# Altium PCB Sensor_Box_RTD2DIG.PCBDOC (part 1 of 2)
Units mm, origin at the board's own origin, x right, y up, seen from the top; angles counter-clockwise.
Board outline 22.3 x 72.8 mm, 2 copper layers (Top, Bot), stack 1.621 mm thick; 89 components, 78 nets, 328 pads, 185 vias.
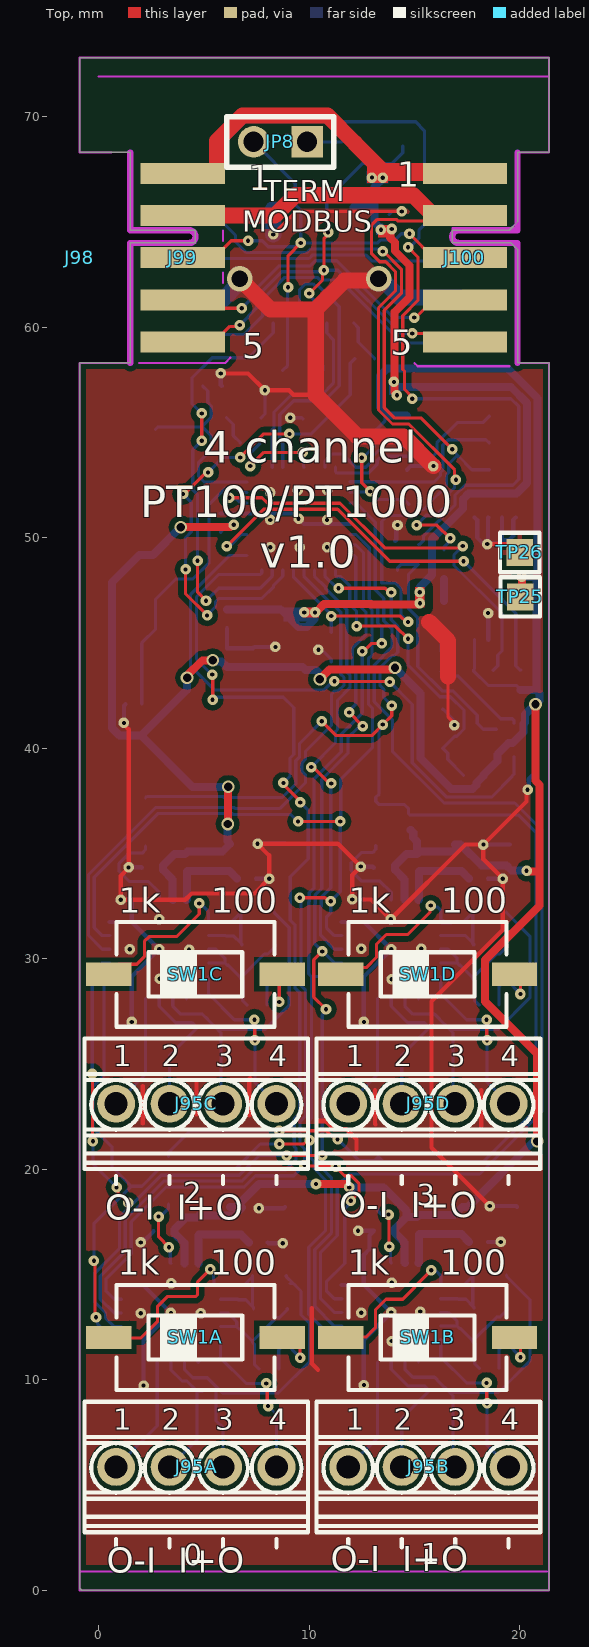
[diagram p0: Top view]
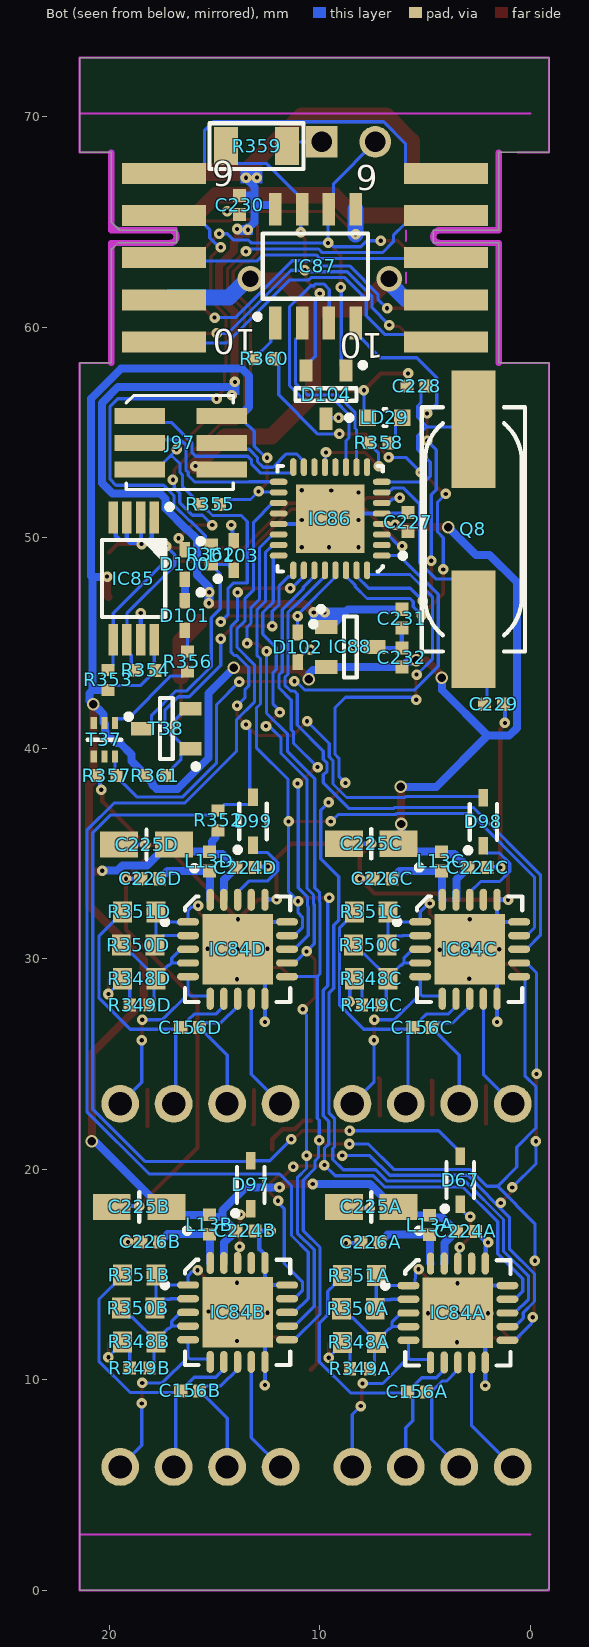
[diagram p1: Bot view, seen from below]
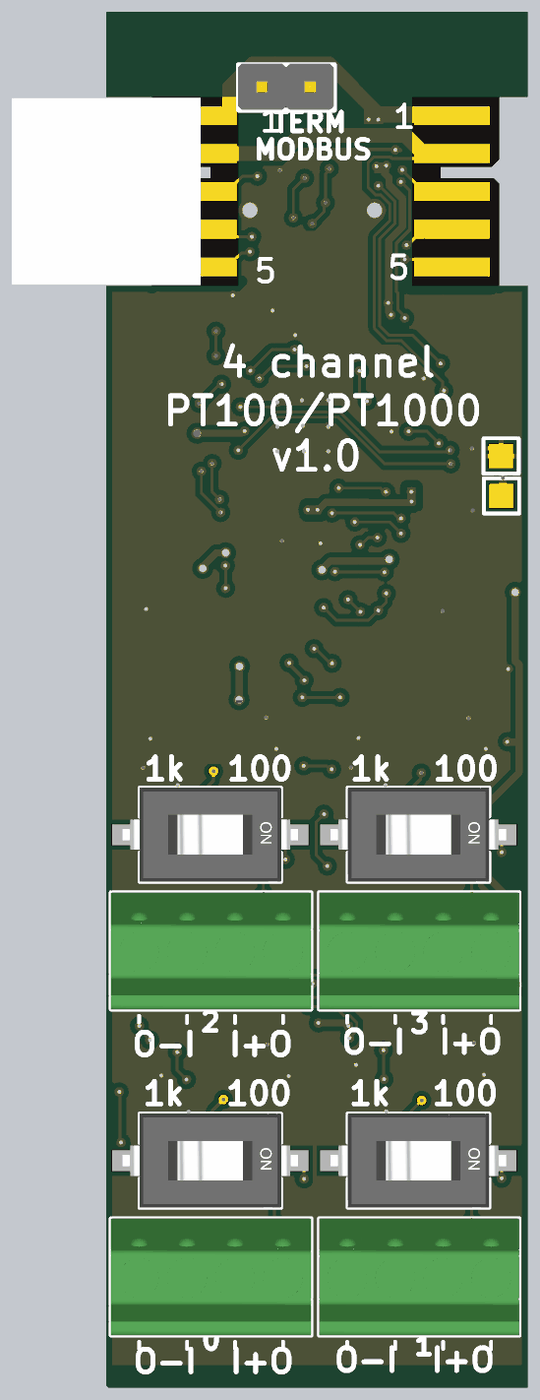
[diagram p3: 3D render of the assembled board from above, using the file's embedded part models]
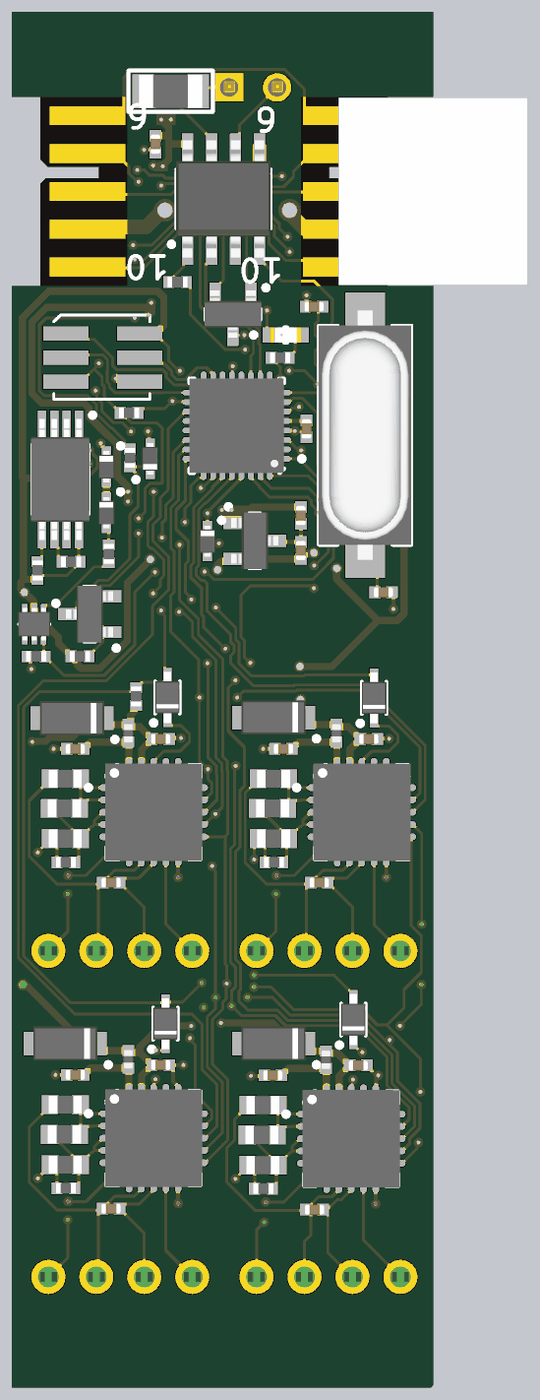
[diagram p4: 3D render of the assembled board from below, using the file's embedded part models]

## Layer stack, top to bottom
TopSolder: solder mask 0.0102, Solder Resist, Dk 3.5
Top: signal copper 0.0356
Dielectric1: core 1.55, FR-4, Dk 4.8
Bot: signal copper 0.0356
BottomSolder: solder mask 0.0102, Solder Resist, Dk 3.5

## Board outline
-0.9,0.1 -0.8,0 21.4,0 21.4,58.3 19.9,58.3 19.9,63.7 19.8,63.8 19.6,64 16.8,64 16.8,64.6 19.5,64.6 19.9,65 19.9,68.3 21.4,68.3 21.4,72.8 -0.9,72.8 -0.9,68.3 1.5,68.3 1.5,64.6 4.6,64.6 4.6,64 1.5,64 1.5,58.3 -0.9,58.3 -0.9,42.9

## Design rules (kind name [scope] priority, off if disabled: settings)
Clearance Clearance_DIFF [(InDifferentialPairClass('All Differential Pairs'))] p1: gap=0.127 ignorepadtopadclearanceinfootprint=FALSE except(0: Arc-Hole Track-Hole SMDPad-Hole THPad-Hole Via-Hole Fill-Hole Poly-Hole Region-Hole Text-Hole; 0.254: Arc-Poly Track-Poly SMDPad-Poly THPad-Poly Via-Poly Fill-Poly Poly-Poly Poly-Region Poly-Text)
Clearance [All] p2: gap=0.127 ignorepadtopadclearanceinfootprint=FALSE except(0: Arc-Hole Track-Hole SMDPad-Hole THPad-Hole Via-Hole Fill-Hole Poly-Hole Region-Hole Text-Hole; 0.254: Arc-Poly Track-Poly SMDPad-Poly Via-Poly; 0.381: THPad-Poly Fill-Poly Poly-Poly)
ComponentClearance [All] p1 off: gap=0.254 collisioncheckmode=3 verticalgap=0.254 showdistances=FALSE
DiffPairsRouting [All] p1: maxlimit=0.254 minlimit=0.127 mostfreqgap=0.127 toplayer_minwidth=0.127 toplayer_maxwidth=0.381 toplayer_prefwidth=0.254 bottomlayer_minwidth=0.127 bottomlayer_maxwidth=0.381 bottomlayer_prefwidth=0.254 maxuncoupledlength=12.7
FabricationTestPointUsage TestPointUsage [All] p1: valid=0 allowmultiple=FALSE
FabricationTestpoint Testpoint [All] p1: side=3 testpointundercomponent=TRUE minsize=1.016 maxsize=2.54 preferedsize=1.524 minholesize=0.508 maxholesize=1.016 preferedholesize=0.813 testpointgrid=0.025 allowsidetop=TRUE allowsidebottom=TRUE usegrid=TRUE gridtolerance=0
Height [All] p1 off: minheight=0 maxheight=25.4 prefheight=12.7
HoleSize [All] p1: absolutevalues=TRUE maxlimit=3.81 minlimit=0.025 maxpercent=80.000 minpercent=20.000
HoleToHoleClearance [All] p1: gap=0.025 allowstackedmicrovias=TRUE
MinimumSolderMaskSliver [All] p1: minsoldermaskwidth=0
PlaneClearance [All] p1: clearance=0.254
PlaneConnect [All] p1: planeconnectstyle=Direct reliefexpansion=0.508 reliefentries=4 reliefconductorwidth=0.254 reliefairgap=0.254
PolygonConnect PolygonConnect_pad [(InPadClass('All Pads'))] p1: connectstyle=Relief reliefconductorwidth=0.254 reliefentries=4 polygonreliefangle="90 Angle" airgapwidth=0.254
PolygonConnect [All] p2: connectstyle=Direct reliefconductorwidth=0.254 reliefentries=4 polygonreliefangle="45 Angle" airgapwidth=0.254
RoomDefinition RTD_Channel1 [InComponentClass('RTD_Channel1')] p1 off: confinementstyle=ConfineIn formatcopy=TRUE lockcomponents=FALSE outline -146.1,-127.6 -95.3,-127.6 -95.3,-102.2 -146.1,-102.2
RoomDefinition RTD_Channel0 [InComponentClass('RTD_Channel0')] p2 off: confinementstyle=ConfineIn formatcopy=TRUE lockcomponents=FALSE outline -146.1,-127.6 -95.3,-127.6 -95.3,-102.2 -146.1,-102.2
RoomDefinition Sensor_Box_RTD2DIG [InComponentClass('Sensor_Box_RTD2DIG')] p3 off: confinementstyle=ConfineIn formatcopy=TRUE lockcomponents=FALSE outline 23.05,73.7 20.625,73.7 20.625,71.525 23.05,71.525
RoomDefinition RTD_Channel2 [InComponentClass('RTD_Channel2')] p4 off: confinementstyle=ConfineIn formatcopy=TRUE lockcomponents=FALSE outline 10.175,19.975 21.199,19.975 21.199,37.225 10.175,37.225
RoomDefinition RTD_Channel3 [InComponentClass('RTD_Channel3')] p5 off: confinementstyle=ConfineIn formatcopy=TRUE lockcomponents=FALSE outline -0.85,19.975 10.175,19.975 10.175,37.225 -0.85,37.225
RoutingVias [All] p1: holewidth=0.2 width=0.5 viastyle="Through Hole" minholewidth=0.2 minwidth=0.5 maxholewidth=1 maxwidth=2
SilkToSilkClearance [All] p1: silktosilkclearance=0
SilkToSolderMaskClearance SilkscreenOverComponentPads [IsPad] p1: minsilkscreentomaskgap=0 clearancetoexposedcopper=TRUE
SolderMaskExpansion [All] p1: expansion=0.051
Width [All] p1: maxlimit=1.27 minlimit=0.127 preferedwidth=0.127
18 further rules are at their usual default settings.

## Classes and differential pairs
channel class RTD_Channel: RTD_Channel0 RTD_Channel1 RTD_Channel2 RTD_Channel3
component class Sensor_Box_RTD2DIG: C227 C228 C229 C230 C231 C232 D67 D97 D98 D99 D100 D101 D102 D103 D104 IC85 IC86 IC87 IC88 J97 J98 J99 J100 JP8 LD29 Q8 R352 R353 R354 R355 R356 R357 R358 R359 R360 R361 R362 T37 T38 TP25 TP26
component class RTD_Channel3: C156D C224D C225D C226D IC84D J95D L13D R348D R349D R350D R351D SW1D
component class RTD_Channel2: C156C C224C C225C C226C IC84C J95C L13C R348C R349C R350C R351C SW1C
component class RTD_Channel1: C156B C224B C225B C226B IC84B J95B L13B R348B R349B R350B R351B SW1B
component class RTD_Channel0: C156A C224A C225A C226A IC84A J95A L13A R348A R349A R350A R351A SW1A

## Components (designator, comment, footprint, x,y, rotation, side; value= is the part's Value field where it differs from the comment)
C156A "100nF" CAPC1005X55N 5.375,9.425 r180 bottom (schematic designator C156)
C156B "100nF" CAPC1005X55N 16.15,9.475 r180 bottom (schematic designator C156)
C156C "100nF" CAPC1005X55N 5.125,26.725 r180 bottom (schematic designator C156)
C156D "100nF" CAPC1005X55N 16.15,26.725 r180 bottom (schematic designator C156)
C224A "100nF" CAPC1005X55N 3.06,17.05 r180 bottom (schematic designator C224)
C224B "100nF" CAPC1005X55N 13.525,17.075 r180 bottom (schematic designator C224)
C224C "100nF" CAPC1005X55N 2.5,34.325 r180 bottom (schematic designator C224)
C224D "100nF" CAPC1005X55N 13.525,34.325 r180 bottom (schematic designator C224)
C225A "10uF" CAPMP3216X180N 7.55,18.21 r0 bottom (schematic designator C225)
C225B "10uF" CAPMP3216X180N 18.575,18.21 r0 bottom (schematic designator C225)
C225C "10uF" CAPMP3216X180N 7.55,35.46 r0 bottom (schematic designator C225)
C225D "10uF" CAPMP3216X180N 18.225,35.425 r0 bottom (schematic designator C225)
C226A "100nF" CAPC1005X55N 7.585,16.525 r180 bottom (schematic designator C226)
C226B "100nF" CAPC1005X55N 18.05,16.55 r180 bottom (schematic designator C226)
C226C "100nF" CAPC1005X55N 7.025,33.8 r180 bottom (schematic designator C226)
C226D "100nF" CAPC1005X55N 18.05,33.8 r180 bottom (schematic designator C226)
C227 "100nF" CAPC1005X55N 5.8,50.738 r270 bottom
C228 "18pF" CAPC1005X55N 5.4,57.2 r180 bottom
C229 "18pF" CAPC1005X55N 1.727,42.088 r0 bottom
C230 "100nF" CAPC1005X55N 13.8,65.8 r270 bottom
C231 "1uF" CAPC1005X55N 6.1,46.15 r90 bottom
C232 "1uF" CAPC1005X55N 6.1,44.3 r270 bottom
D67 "1N4148WS" SODFL2512X100N 3.325,19.478 r90 bottom
D97 "1N4148WS" SODFL2512X100N 13.275,19.26 r90 bottom
D98 "1N4148WS" SODFL2512X100N 2.225,36.5 r90 bottom
D99 "1N4148WS" SODFL2512X100N 13.167,36.525 r90 bottom
D100 "PESD3V3S1UB" SODFL1608X65N 16.4,48.73 r270 bottom
D101 "PESD3V3S1UB" SODFL1608X65N 16.4,46.3 r270 bottom
D102 "PESD3V3S1UB" SODFL1608X65N 11.05,44.795 r270 bottom
D103 "PESD3V3S1UB" SODFL1608X65N 14.088,49.15 r90 bottom
D104 "SM712" SOT95P237X112-3N 9.7,56.8 r270 bottom
IC84A "MAX31865ATP+" QFN65P500X500X80-21N-S335 3.435,13.175 r180 bottom (schematic designator IC84)
IC84B "MAX31865ATP+" QFN65P500X500X80-21N-S335 13.9,13.2 r180 bottom (schematic designator IC84)
IC84C "MAX31865ATP+" QFN65P500X500X80-21N-S335 2.875,30.45 r180 bottom (schematic designator IC84)
IC84D "MAX31865ATP+" QFN65P500X500X80-21N-S335 13.9,30.45 r180 bottom (schematic designator IC84)
IC85 "M24256-BRDW6" SOP65P640X120-8N 18.833,48.058 r270 bottom
IC86 "ATMEGA328PB-MU" QFN50P500X500X100-33N-S325 9.5,50.9 r0 bottom
IC87 "ST485ECDR" SOIC127P600X175-8N 10.2,62.9 r90 bottom
IC88 "AP7313-33SAG-7" SOT95P240X130-3N 8.539,44.809 r180 bottom
J95A "Family" PHOENIX_1725672 4.64,5.86 r0 top (schematic designator J95)
J95B "Family" PHOENIX_1725672 15.665,5.86 r0 top (schematic designator J95)
J95C "Family" PHOENIX_1725672 4.64,23.11 r0 top (schematic designator J95)
J95D "Family" PHOENIX_1725672 15.665,23.11 r0 top (schematic designator J95)
J97 "ZL322-2X3P or PLHTD6S-TR-CV" ZL322-2X3P 16.6,54.5 r270 bottom
J98 "=Family" "AVX_00 9159 010 061 916" -0.9,63.3 r180 top
J99 "=Family" EDGE10T1B6_P200W1000L0F100X400 4,67.3 r270 top locked
J100 "=Family" EDGE10T5B10_P200W1000L0F100X400 17.4,59.3 r90 top locked
JP8 "1798942 (goldpin 2x 2.54)" jump 9.9,68.8 r270 top
L13A "220R@100MHz" INDC1005X55N 4.775,17.35 r90 bottom (schematic designator L13)
L13B "220R@100MHz" INDC1005X55N 15.24,17.375 r90 bottom (schematic designator L13)
L13C "220R@100MHz" INDC1005X55N 4.215,34.625 r90 bottom (schematic designator L13)
L13D "220R@100MHz" INDC1005X55N 15.24,34.625 r90 bottom (schematic designator L13)
LD29 "Green" LED_KINGBRIGHT_KPH-1608CGCK 6.9,55.7 r180 bottom
Q8 "8.192MHz" XTAL_ABRACON_ABLS 2.7,50.4 r270 bottom
R348A "442" RESC1608X55N 8.11,11.775 r0 bottom (schematic designator R348)
R348B "442" RESC1608X55N 18.575,11.8 r0 bottom (schematic designator R348)
R348C "442" RESC1608X55N 7.55,29.05 r0 bottom (schematic designator R348)
R348D "442" RESC1608X55N 18.575,29.05 r0 bottom (schematic designator R348)
R349A "22k" RESC1005X40N 8.085,10.525 r0 bottom (schematic designator R349)
R349B "22k" RESC1005X40N 18.55,10.55 r0 bottom (schematic designator R349)
R349C "22k" RESC1005X40N 7.525,27.8 r0 bottom (schematic designator R349)
R349D "22k" RESC1005X40N 18.55,27.8 r0 bottom (schematic designator R349)
R350A "3k9" RESC1608X55N 8.16,13.375 r180 bottom (schematic designator R350)
R350B "3k9" RESC1608X55N 18.625,13.4 r180 bottom (schematic designator R350)
R350C "3k9" RESC1608X55N 7.6,30.65 r180 bottom (schematic designator R350)
R350D "3k9" RESC1608X55N 18.625,30.65 r180 bottom (schematic designator R350)
R351A "10M" RESC1608X55N 8.11,14.95 r0 bottom (schematic designator R351)
R351B "10M" RESC1608X55N 18.575,14.975 r0 bottom (schematic designator R351)
R351C "10M" RESC1608X55N 7.55,32.225 r0 bottom (schematic designator R351)
R351D "10M" RESC1608X55N 18.575,32.225 r0 bottom (schematic designator R351)
R352 "10k" RESC1005X40N 14.825,36.575 r270 bottom
R353 "10k" RESC1005X40N 20.05,43.24 r90 bottom
R354 "10k" RESC1005X40N 18.27,43.7 r0 bottom
R355 "10k" RESC1005X40N 15.2,51.579 r0 bottom
R356 "1k" RESC1005X40N 16.275,44.118 r90 bottom
R357 "10k" RESC1005X40N 20.125,38.694 r180 bottom
R358 "10k" RESC1005X40N 7.2,54.5 r180 bottom
R359 "120R" 1206R 13,68.6 r180 bottom
R360 "1k" RESC1005X40N 12.632,58.5 r0 bottom
R361 "100k" RESC1005X40N 17.8,38.7 r0 bottom
R362 "49R9" RESC1005X40N 15.15,49.2 r270 bottom
SW1A "Switch" SW_OMRON_A6SN-1101 4.6,12.01 r0 top (schematic designator SW1)
SW1B "Switch" SW_OMRON_A6SN-1101 15.625,12.01 r0 top (schematic designator SW1)
SW1C "Switch" SW_OMRON_A6SN-1101 4.6,29.26 r0 top (schematic designator SW1)
SW1D "Switch" SW_OMRON_A6SN-1101 15.625,29.26 r0 top (schematic designator SW1)
T37 "BC857BV" SOTFL50P160X60-6N 20.225,40.4 r270 bottom
T38 "BSS138LT1G" SOT95P240X110-3N 17.283,40.931 r0 bottom
TP25 "Test Point" TPS127 20.025,47.188 r270 top
TP26 "Test Point" TPS127 20,49.296 r180 top

## Footprints (in the part's own frame and the unit in brackets; to place one, negate y for a bottom-side part, rotate by r counter-clockwise, add the part's x,y. Pads: shape width x height; smd on the part's side, far side on the other; paste and mask are expansions set on the pad)
1206R [mm]
  rect 1.15x1.8 smd: 1(-1.45,0) 2(1.45,0)
  silkscreen extent -2.24,-1.09 2.24,1.09, body extent -1.67,-0.87 1.68,0.88, height 0.65
"AVX_00 9159 010 061 916" [mm] "10 Contacts, 2mm Pitch, Open Ended Card Edge Connector, 9159 Series"
  body extent -5,-4.95 5,4.95, height 1.7
CAPC1005X55N [mm] "Capacitor, Non-Polarized, Chip; 1.00mm L X 0.50mm W X 0.70mm H, IPC Medium Density"
  rect 0.62x0.62 smd: 1(-0.45,0) 2(0.45,0)
  body extent -0.52,-0.27 0.53,0.28, height 0.55
CAPMP3216X180N [mm] "Capacitor, Polarized, Molded  Body 3.2x1.6mm, IPC Medium Density"
  rect 1.8x1.25 smd: 1(-1.3,0) 2(1.3,0)
  silkscreen extent -2.4,-0.7 0,1.25, body extent -1.7,-0.9 1.7,0.9, height 1.6
EDGE10T1B6_P200W1000L0F100X400 [mm] "10 contacts Board Edge Connector, First Left Top Pad 1, First Left Bottom Pad 2, Pitch 2mm, Length 0mm, Width 10mm, Finger Lenght 4mm, Finger Width 1mm"
  rect 1x4 smd paste-0.5: 1(0,0) 2(2,0) 3(4,0) 4(6,0) 5(8,0)
  rect 1x4 smd far side paste-0.5: 6(0,0) 7(2,0) 8(4,0) 9(6,0) 10(8,0)
  KeepOutLayer lines w0.3: 9,-2.5 3.3,-2.5 3.3,0.3 ccw(c3,0.3) 2.7,0.3 2.7,-2.5 -1,-2.5
EDGE10T5B10_P200W1000L0F100X400 [mm] "10 contacts Board Edge Connector, First Left Top Pad 5, First Left Bottom Pad 10, Pitch 2mm, Length 0mm, Width 10mm, Finger Lenght 4mm, Finger Width 1mm"
  rect 1x4 smd paste-0.5: 1(8,0) 2(6,0) 3(4,0) 4(2,0) 5(0,0)
  rect 1x4 smd far side paste-0.5: 6(8,0) 7(6,0) 8(4,0) 9(2,0) 10(0,0)
  KeepOutLayer lines w0.3: -1,-2.5 4.7,-2.5 4.7,0.3 cw(c5,0.3) 5.3,0.3 5.3,-2.5 9,-2.5
INDC1005X55N [mm] "Chip Inductor, 2-Leads, EIA 0402, Metric 1005, Body 1x0.5mm, 0402IPC Medium Density"
  rect 0.6x0.62 smd: 1(-0.46,0) 2(0.46,0)
  body extent -0.52,-0.27 0.53,0.28, height 0.55
jump [mm]
  rect 1.5x1.5 hole 0.965: 1(0,0)
  round 1.5 hole 0.965: 2(0,-2.54)
  silkscreen extent -1.2,-3.81 1.2,1.27, body extent -1.26,-3.84 1.19,1.24, height 8
LED_KINGBRIGHT_KPH-1608CGCK [mm] "SMT Green LED, Case 0603, Body L 1.6 x W 0.8mm H 0.65mm"
  rect 0.8x0.8 smd: 1(-0.825,0) 2(0.825,0)
  silkscreen extent -1.83,-0.4 0.08,0.4, body extent -0.8,-0.4 0.8,0.4, height 0.65
PHOENIX_1725672 [mm] "Micro PCB Terminal Block, Pitch 2.54mm, 4 Positions, Screw Connection"
  round 1.8 hole 1.1: 1(-3.81,0) 2(-1.27,0) 3(1.27,0) 4(3.81,0)
  silkscreen extent -5.31,-3.81 5.31,3.1, body extent -5.31,-3.1 5.31,3.1, height 8.5
QFN50P500X500X100-33N-S325 [mm] "QFN, (MO-220-VHHD-4) 0.50mm pitch,square; 8 pin X 8 pin, 5mm X 5mm X 1.00mm H body (w/thermal tab 3.25 X 3.25mm),  IPC Medium Density"
  oval 0.85x0.3 smd: 1(-2.45,1.75) 2(-2.45,1.25) 3(-2.45,0.75) 4(-2.45,0.25) 5(-2.45,-0.25) 6(-2.45,-0.75) 7(-2.45,-1.25) 8(-2.45,-1.75) 17(2.45,-1.75) 18(2.45,-1.25) 19(2.45,-0.75) 20(2.45,-0.25) 21(2.45,0.25) 22(2.45,0.75) 23(2.45,1.25) 24(2.45,1.75)
  oval 0.3x0.85 smd: 9(-1.75,-2.45) 10(-1.25,-2.45) 11(-0.75,-2.45) 12(-0.25,-2.45) 13(0.25,-2.45) 14(0.75,-2.45) 15(1.25,-2.45) 16(1.75,-2.45) 25(1.75,2.45) 26(1.25,2.45) 27(0.75,2.45) 28(0.25,2.45) 29(-0.25,2.45) 30(-0.75,2.45) 31(-1.25,2.45) 32(-1.75,2.45)
  rect 3.25x3.25 smd: 33(0,0)
  silkscreen extent -3.57,-2.5 2.5,2.5, body extent -2.5,-2.5 2.5,2.5, height 1
QFN65P500X500X80-21N-S335 [mm] "QFN, 0.65mm pitch,square; 20 pin, 5mm X 5mm X 0.8mm H body (w/thermal tab 3.35 X 3.35mm),  IPC Medium Density"
  oval 1.05x0.35 smd: 1(-2.35,1.3) 2(-2.35,0.65) 3(-2.35,0) 4(-2.35,-0.65) 5(-2.35,-1.3) 11(2.35,-1.3) 12(2.35,-0.65) 13(2.35,0) 14(2.35,0.65) 15(2.35,1.3)
  oval 0.35x1.05 smd: 6(-1.3,-2.35) 7(-0.65,-2.35) 8(0,-2.35) 9(0.65,-2.35) 10(1.3,-2.35) 16(1.3,2.35) 17(0.65,2.35) 18(0,2.35) 19(-0.65,2.35) 20(-1.3,2.35)
  rect 3.35x3.35 smd: 21(0,0)
  silkscreen extent -3.58,-2.5 2.5,2.5, body extent -2.57,-2.57 2.58,2.58, height 1
RESC1005X40N [mm] "Chip Resistor, EIA 0402, Metric 1005, Body 1.0x0.5mm, IPC Medium Density"
  rect 0.58x0.62 smd: 1(-0.47,0) 2(0.47,0)
  body extent -0.52,-0.27 0.53,0.28, height 0.4
RESC1608X55N [mm] "Chip Resistor, EIA 0603, Metric 1608, Body 1.6x0.8mm, IPC Medium Density"
  rect 0.9x1 smd: 1(-0.8,0) 2(0.8,0)
  body extent -0.87,-0.47 0.88,0.48, height 0.55
SODFL1608X65N [mm] "Ultra Small Outline Diode Flat Lead (SOD-523), Body; 1.2mm L X 0.8mm W X 0.65mm H, IPC Medium Density"
  rect 0.75x0.5 smd: 1(-0.7,0) 2(0.7,0)
  silkscreen extent -1.22,0.63 -0.98,0.87, body extent -0.82,-0.42 0.83,0.43, height 0.65
SODFL2512X100N [mm] "SODFL Diode; 1.70mm W X 1.25mm L X 1.00mm H body, IPC Medium Density"
  rect 0.84x0.46 smd: 1(-1.14,0) 2(1.14,0)
  silkscreen extent -1.47,-0.65 0.85,0.86, body extent -1.35,-0.65 1.35,0.65, height 1
SOIC127P600X175-8N [mm] "SOIC 8, Pitch 1.27mm - Body 4x5mm, IPC Medium Density"
  rect 1.55x0.6 smd: 1(-2.7,1.905) 2(-2.7,0.635) 3(-2.7,-0.635) 4(-2.7,-1.905) 5(2.7,-1.905) 6(2.7,-0.635) 7(2.7,0.635) 8(2.7,1.905)
  silkscreen extent -2.52,-2.5 1.55,2.88, body extent -3.1,-2.5 3.1,2.5, height 1.75
SOP65P640X120-8N [mm] "SOP, 0.65mm pitch; 8 pin, 4.40mm W X 3.00mm L X 1.20mm H body, IPC Medium Density"
  rect 1.5x0.45 smd: 1(-2.9,0.975) 2(-2.9,0.325) 3(-2.9,-0.325) 4(-2.9,-0.975) 5(2.9,-0.975) 6(2.9,-0.325) 7(2.9,0.325) 8(2.9,0.975)
  silkscreen extent -3.52,-1.5 1.83,1.82, body extent -3.2,-1.55 3.2,1.55, height 1.2
SOT95P237X112-3N [mm] "SOT, 0.95mm, pitch; 3 pin,1.30mm W X 2.92mm L X 1.12mm H body, IPC Medium Density"
  rect 1.05x0.6 smd: 1(-1.15,0.95) 2(-1.15,-0.95) 3(1.15,0)
  silkscreen extent -1.52,-1.45 0.3,1.87, body extent -1.25,-1.5 1.25,1.5, height 1.1
SOT95P240X110-3N [mm] "SOT23 3-Leads, Pitch 0.95mm, Body 1.3x2.9mm, IPC Medium Density"
  rect 1.05x0.65 smd: 1(-1.15,0.95) 2(-1.15,-0.95) 3(1.15,0)
  silkscreen extent -1.52,-1.45 0.3,1.92, body extent -1.25,-1.5 1.25,1.5, height 1.1
SOT95P240X130-3N [mm] "SOT23 3-Leads, Pitch 0.95mm - Body 1.3x2.9mm, IPC Medium Density"
  rect 1.05x0.65 smd: 1(-1.15,0.95) 2(-1.15,-0.95) 3(1.15,0)
  silkscreen extent -1.53,-1.45 0.3,1.92, body extent -1.25,-1.5 1.25,1.5, height 1.3
SOTFL50P160X60-6N [mm] "SOTFL (SOT666), 0.50mm, Pitch; 6 Pin, 1.20mm W X 1.60mm L X 0.60mm H Body, IPC Medium Density"
  rect 0.57x0.3 smd: 1(-0.79,0.5) 2(-0.79,0) 3(-0.79,-0.5) 4(0.79,-0.5) 5(0.79,0) 6(0.79,0.5)
  silkscreen extent -1.22,-0.8 0,1.27, body extent -0.85,-0.85 0.85,0.85, height 0.6
SW_OMRON_A6SN-1101 [mm] "Body 4.48x7.5mm, 1 Way SPST Surface-Mounting Slide Switch With Flat Actuator (A6SN Series)"
  rect 2.15x1.1 smd: 1(-4.125,0) 2(4.125,0)
  silkscreen extent -3.75,-2.49 3.75,2.49, body extent -4.65,-2.49 4.65,2.49, height 4.6
TPS127 [mm] "1.27 x  1.27mm SMD Test Point Area"
  rect 1.27x1.27 smd paste-1.27: 1(0,0)
  silkscreen extent -0.94,-0.94 0.94,0.94
XTAL_ABRACON_ABLS [mm] "HC/49US (AT49) SMD Cristal, Body 11.4x4.7mm, ABLS Serie"
  rect 5.6x2.1 smd: 1(-4.75,0) 2(4.75,0)
  silkscreen extent -5.8,-2.45 5.8,2.45, body extent -6.6,-2.45 6.6,2.45, height 4.2
ZL322-2X3P [mm] "SMT 1.27 mm dual goldpin"
  rect 0.76x2.4 smd: 1(-1.27,-1.95) 2(-1.27,1.95) 3(0,-1.95) 4(0,1.95) 5(1.27,-1.95) 6(1.27,1.95)
  silkscreen extent -2.25,-2.58 2.2,2.5, body extent -2.05,-2.15 2.03,2.15, height 4.5

## Part data
C156A C156B C156C C156D C224A C224B C224C C224D C226A C226B C226C C226D C227: library part CC0402_100NF_16V_10%_X5R, "Non-polarised capacitor", Case=0402, Manufacturer=GENERIC, Manufacturer1 ComponentHeight=0.55mm, Manufacturer1 Example=MURATA, Manufacturer1 Part Number=GRM155R61C104KA88D, Tolerance=±10%, Voltage=16V, Author="CERN DEM JLC", Component Type=Standard, CreateDate=10.12.2013, HelpURL=\\cern.ch\dfs\Applications\Altium\Datasheets\CC0402_X5R_MURATA_GRM.pdf, LatestRevisionDate=10.12.2013, Manufacturer Part Number=CC0402_100NF_16V_10%_X5R, Mounted=Yes, Part Description="SMD Multilayer Chip Ceramic Capacitor", Part Number=CC0402_100NF_16V_10%_X5R, Pin Count=2, Sense=No, SMD=Yes, Socket=No, Status=None, TC=X5R
C225A C225B C225C C225D: library part CTE3216-18_10UF_16V_20%_AVX_TCJ, "Polarised capacitor", Case=A, Manufacturer=AVX, Manufacturer Part Number=TCJA106M016R0200, Tolerance=±20%, Voltage=16V, Author="CERN DEM JLC", ComponentHeight=1.8mm, Component Type=Standard, CreateDate=29.03.2012, HelpURL=\\cern.ch\dfs\Applications\Altium\Datasheets\CTE_AVX_TCJ.pdf, LatestRevisionDate=29.03.2012, Mounted=Yes, Part Description="ESR 0R200 Tantalum Solid Electrolytic Chip Capacitor with Conductive Polymer Electrode", Part Number=CTE3216-18_10UF_16V_20%_AVX_TCJ, Pin Count=2, Sense=No, SMD=Yes, Socket=No, Status=Preferred
C228 C229: library part CC0402_18PF_50V_5%_C0G, "Non-polarised capacitor", Case=0402, Manufacturer=GENERIC, Manufacturer1 ComponentHeight=0.55mm, Manufacturer1 Example=KEMET, Manufacturer1 Part Number=C0402C180J5GACTU, Tolerance=±5%, Voltage=50V, Author="CERN DEM JLC", Component Type=Standard, CreateDate=04.10.2016, HelpURL="\\cern.ch\dfs\Applications\Altium\Datasheets\CC0805_C0G_KEMET_(Commercial Grade).pdf", LatestRevisionDate=04.10.2016, Manufacturer Part Number=CC0402_18PF_50V_5%_C0G, Mounted=Yes, Part Description="SMD Multilayer Chip Ceramic Capacitor", Part Number=CC0402_18PF_50V_5%_C0G, Pin Count=2, Sense=No, SMD=Yes, Socket=No, Status=Preferred, TC=C0G/NP0
C230: library part CC0402_100NF_16V_10%_X7R, "Non-polarised capacitor", Case=0402, Manufacturer=GENERIC, Manufacturer1 ComponentHeight=0.55mm, Manufacturer1 Example=MURATA, Manufacturer1 Part Number=GRM155R71C104KA88D, Tolerance=±10%, Voltage=16V, Author="CERN DEM JLC", Component Type=Standard, CreateDate=05.12.2013, HelpURL=\\cern.ch\dfs\Applications\Altium\Datasheets\CC0402_X7R_MURATA_GRM.pdf, LatestRevisionDate=03.12.2007, Manufacturer Part Number=CC0402_100NF_16V_10%_X7R, Mounted=Yes, Part Description="SMD Multilayer Chip Ceramic Capacitor", Part Number=CC0402_100NF_16V_10%_X7R, Pin Count=2, Sense=No, SMD=Yes, Socket=No, Status="Not Recommended", TC=X7R
C231 C232: library part CC0402_1UF_16V_10%_X5R, "Non-polarised capacitor", Case=0402, Manufacturer=GENERIC, Manufacturer1 ComponentHeight=0.55mm, Manufacturer1 Example=TDK, Manufacturer1 Part Number=C1005X5R1C105KT, Tolerance=±10%, Voltage=16V, Author="CERN DEM JLC", Component Type=Standard, CreateDate=25.10.2012, HelpURL=\\cern.ch\dfs\Applications\Altium\Datasheets\CC0402_X5R_TDK_C.pdf, LatestRevisionDate=25.10.2012, Manufacturer Part Number=CC0402_1UF_16V_10%_X5R, Mounted=Yes, Part Description="SMD Multilayer Chip Ceramic Capacitor", Part Number=CC0402_1UF_16V_10%_X5R, Pin Count=2, Sense=No, SMD=Yes, Socket=No, Status=Preferred, TC=X5R
D67 D97 D98 D99: "Diode", Case=SOD-323F, Manufacturer="FAIRCHILD SEMICONDUCTOR", Power=150mA, Voltage=75V, Author="CERN DEM JLC", Bonding=No, ComponentHeight=1mm, Component Type=Standard, CreateDate=12.05.2011, Device=1N4148WS, HelpURL=\\cern.ch\dfs\Applications\Altium\Datasheets\1N4148WS.pdf, LatestRevisionDate=12.05.2011, Manufacturer Part Number=1N4148WS, Mounted=Yes, PackageDescription="SODFL Diode; 1.70mm W X 1.25mm L X 1.00mm H body, IPC Medium Density", Part Description="Small Signal Diodes", Part Number=1N4148WS, Pin Count=2, PressFit=No, Sense=No, SMD=Yes, Socket=No
D100 D101 D102 D103: "ESD protection diode", Case=SOD523, Manufacturer="NXP SEMICONDUCTORS", Power=330W, Voltage=3V3, Author="CERN DEM JLC", Bonding=No, ComponentHeight=0.65mm, Component Type=Standard, CreateDate=29.11.2012, Device=PESD3V3S1UB, HelpURL=\\cern.ch\dfs\Applications\Altium\Datasheets\PESD3V3S1UB.pdf, LatestRevisionDate=29.11.2012, Manufacturer Part Number=PESD3V3S1UB, Mounted=Yes, PackageDescription="Ultra Small Outline Diode Flat Lead (SOD-523), Body; 1.2mm L X 0.8mm W X 0.65mm H, IPC Medium Density", Part Description="ESD protection diode (23kV)", Part Number=PESD3V3S1UB, Pin Count=2, PressFit=No, Sense=No, SMD=Yes, Socket=No
D104: "Asymmetrical TVS Diode for Extended Common-Mode RS-485", Case=SOT-23, Manufacturer=SEMTECH, Power=400W, Voltage=12V/-7V, Author="CERN DEM JLC", Bonding=No, ComponentHeight=1.12mm, Component Type=Standard, CreateDate=23.04.2012, Device=SM712, HelpURL=\\cern.ch\dfs\Applications\Altium\Datasheets\SM712.pdf, LatestRevisionDate=23.04.2012, Manufacturer Part Number=SM712, Mounted=Yes, PackageDescription="SOT, 0.95mm, pitch; 3 pin,1.30mm W X 2.92mm L X 1.12mm H body, IPC Medium Density", Part Description="Asymmetrical TVS Diode for Extended Common-Mode RS-485", Part Number=SM712, Pin Count=3, PressFit=No, Sense=No, SMD=Yes, Socket=No, Status=Obsolete
IC84A IC84B IC84C IC84D: "RTD-to-Digital Converter", Case=QFN20, Manufacturer=MAXIM, Author="CERN DEM MR", Bonding=No, ComponentHeight=0.8mm, Component Type=Standard, CreateDate=09.06.2016, Device=MAX31865ATP+, HelpURL=\\cern.ch\dfs\Applications\Altium\Datasheets\MAX31865ATP+.pdf, LatestRevisionDate=09.06.2016, Manufacturer Part Number=MAX31865ATP+, Mounted=Yes, PackageDescription="QFN, 0.65mm pitch, Square; 20 pin, 5.00mm L X 5.00mm W X 0.80mm H Body (W/Thermal Tab 3.35mm X 3.35mm), IPC Medium Density", Part Description="RTD-to-Digital Converter", Part Number=MAX31865ATP+, Pin Count=21, PressFit=No, Sense=No, SMD=Yes, Socket=No
IC85: "256-Kbit Serial I²C Bus EEPROM", Case=TSSOP8, Manufacturer="ST MICROELECTRONICS", Part Number=M24256-BRDW6P, Author="CERN DEM MR", Bonding=No, ComponentHeight=1.2mm, Component Type=Standard, CreateDate=17.03.2016, Device=M24256-BRDW6, HelpURL=\\cern.ch\dfs\Applications\Altium\Datasheets\M24256-BRDW6P.pdf, LatestRevisionDate=17.03.2016, Manufacturer Part Number=M24256-BRDW6, Mounted=Yes, PackageDescription="SOP, 0.65mm pitch; 8 pin, 4.40mm W X 3.00mm L X 1.20mm H body, IPC Medium Density", Part Description="256-Kbit Serial I²C Bus EEPROM", Pin Count=8, PressFit=No, Sense=No, SMD=Yes, Socket=No
IC86: "8-bit AVR 20MHz Microcontroller With 32K Bytes In-System  Programmable  Flash", Case=QFN32, Manufacturer=ATMEL, Author=GK, Bonding=No, ComponentHeight=1mm, Component Type=Standard, CreateDate=2011-02-08, Device=ATMEGA328PB-MU, HelpURL=\\cern.ch\dfs\Applications\Altium\Datasheets\ATMEGA328P-MU.pdf, LatestRevisionDate=2014-07-02, Manufacturer Part Number=ATMEGA328PB-MU, Mounted=Yes, PackageDescription="QFN, (MO-220-VHHD-2) 0.50mm pitch,square; 8 pin X 8 pin, 5mm X 5mm X 1.00mm H body (w/thermal tab 3.25 X 3.25mm),  IPC Medium Density", Part Description="8-bit AVR Microcontroller, 32KB Flash, 1KB EEPROM, 2KB SRAM, 32-pin MLF, Industrial Grade (-40°C to 85°C)", Part Number=ATMEGA328PB-MU, Pin Count=33, PressFit=No, Sense=No, SMD=Yes, Socket=No
IC87: "±15kV ESD-Protected, Low Power  RS-485/RS-422 Transceiver", Case=SOIC8, Manufacturer="ST MICROELECTRONICS", Author="CERN DEM MR", Bonding=No, ComponentHeight=1.75mm, Component Type=Standard, CreateDate=15.02.2018, Device=ST485ECDR, HelpURL=\\cern.ch\dfs\Applications\Altium\Datasheets\ST485ECDR.pdf, LatestRevisionDate=15.02.2018, Manufacturer Part Number=ST485ECDR, Mounted=Yes, PackageDescription="SOIC 8, Pitch 1.27mm - Body 4x5mm, IPC Medium Density", Part Description="±15kV ESD-Protected, Low Power  RS-485/RS-422 Transceiver", Part Number=ST485ECDR, Pin Count=8, PressFit=No, Sense=No, SMD=Yes, Socket=No
IC88: "3-Terminal Regulator 1=IN 2=OUT 3=GND", Case=SOT23, Manufacturer="DIODES INCORPORATED", Author="CERN DEM JLC", Bonding=No, ComponentHeight=1.35mm, Component Type=Standard, CreateDate=20.03.2018, Device=AP7313-33SAG-7, HelpURL=\\cern.ch\dfs\Applications\Altium\Datasheets\AP7313-33SAG-7.pdf, LatestRevisionDate=20.03.2018, Manufacturer Part Number=AP7313-33SAG-7, Mounted=Yes, PackageDescription="SOT23 3-Leads, Pitch 0.95mm - Body 1.3x2.9mm, IPC Medium Density", Part Description="3.3V, 150mA Low Quiescent Current, Fast Transient Low Dropout Linear Regulator", Part Number=AP7313-33SAG-7, Pin Count=3, PressFit=No, Sense=No, SMD=Yes, Socket=No
J95A J95B J95C J95D: library part PHOENIX_1725672, "Terminal Block, 4 Positions, Screw Connection", Manufacturer="PHOENIX CONTACT", Manufacturer Part Number="1725672 (MPT 0,5/4-2,54)", Author="CERN DEM JMW", ComponentHeight=8.5mm, Component Type=Standard, CreateDate=07.11.2008, HelpURL=\\cern.ch\dfs\Applications\Altium\Datasheets\PHOENIX_1725672.pdf, LatestRevisionDate=26.04.2010, Mounted=Yes, Part Description="6A, 63V, Terminal Block, Pitch 2.54mm, 4 Positions, Screw Connection", Part Number=PHOENIX_1725672, Pin Count=4, PressFit=No, Sense=No, SMD=No, Socket=No, Status=None
J97: library part "CON_2x3 1.27 SMT Male", "1.27 mm dual row goldpin (Maritex)"
J98: library part "AVX_00 9159 010 061 916", "Open Ended Card Edge Connector, 9159 Series", Manufacturer=AVX, Manufacturer Part Number="00 9159 010 061 916", Author="CERN DEM MR", ComponentHeight=1.6mm, Component Type=Standard, CreateDate=13.02.2018, HelpURL="\\cern.ch\dfs\Applications\Altium\Datasheets\AVX_00 9159 010 061 916.pdf", LatestRevisionDate=13.02.2018, Mounted=Yes, Part Description="10 Contacts, 2mm Pitch, Open Ended Card Edge Connector, 9159 Series", Part Number="AVX_00 9159 010 061 916", Pin Count=10, PressFit=No, Sense=No, SMD=No, Socket=No, Status=None
J99: library part EDGE10T1B6_P200W1000L0F100X400, "PCB Edge Connector 10 (2x5)", Author="CERN DEM MR", ComponentHeight=0mm, Component Type="Standard (No BOM)", CreateDate=14.02.2018, HelpURL=\\cern.ch\dfs\Applications\Altium\Datasheets\EDGE10T1B6_P200W1000L0F100X400.pdf, LatestRevisionDate=14.02.2018, Mounted=No, Part Description="10 Contacts Board Edge Connector, Pitch 2mm, Length 0mm, Width 10mm, Finger Lenght 4mm, Finger Width 1mm", Part Number=EDGE10T1B6_P200W1000L0F100X400, Pin Count=10, PressFit=No, Sense=No, SMD=No, Socket=No, Status=None
J100: library part EDGE10T5B10_P200W1000L0F100X400, "PCB Edge Connector 10 (2x5)", Author="CERN DEM MR", ComponentHeight=0mm, Component Type="Standard (No BOM)", CreateDate=14.02.2018, HelpURL=\\cern.ch\dfs\Applications\Altium\Datasheets\EDGE10T5B10_P200W1000L0F100X400.pdf, LatestRevisionDate=14.02.2018, Mounted=No, Part Description="10 Contacts Board Edge Connector, Pitch 2mm, Length 0mm, Width 10mm, Finger Lenght 4mm, Finger Width 1mm", Part Number=EDGE10T5B10_P200W1000L0F100X400, Pin Count=10, PressFit=No, Sense=No, SMD=No, Socket=No, Status=None
JP8: library part JUMPER, "Jumper", Supplier Part Number 1=1798942, Supplier 1=Farnell
L13A L13B L13C L13D: library part IND0402_MURATA_BLM15HB221SN1, "Inductor", Case=0402, Manufacturer=MURATA, Manufacturer Part Number=BLM15HB221SN1, Power=250mA, Resistance=1R, Tolerance=±25%, Author="CERN DEM JLC", ComponentHeight=0.55mm, Component Type=Standard, CreateDate=23.06.2009, HelpURL=\\cern.ch\dfs\Applications\Altium\Datasheets\IND0402_MURATA_BLM15H.pdf, LatestRevisionDate=23.06.2009, Mounted=Yes, Part Description="SMD EMIFIL Suppression Chip Ferrite Bead", Part Number=IND0402_MURATA_BLM15HB221SN1, Pin Count=2, Sense=No, SMD=Yes, Socket=No, Status=None
LD29: library part LED_KINGBRIGHT_KPH-1608CGCK, "LED Green 1C 2A", Manufacturer=KINGBRIGHT, Manufacturer Part Number=KPH-1608CGCK, Author="CERN DEM JLC", Bonding=No, Color=Green, ComponentHeight=0.65mm, Component Type=Standard, CreateDate=03.07.2017, HelpURL=\\cern.ch\dfs\Applications\Altium\Datasheets\LED_KINGBRIGHT_KPH-1608CGCK.pdf, LatestRevisionDate=03.07.2017, Mounted=Yes, PackageDescription="SMT Green LED, Case 0603, Body L 1.6 x W 0.8mm H 0.65mm", Part Description="SMD Green LED, Case 1.6mmX0.8mm(0603), 0.65mm Thickness", Part Number=LED_KINGBRIGHT_KPH-1608CGCK, Pin Count=2, PressFit=No, Sense=No, SMD=Yes, Socket=No
Q8: library part XTAL_8.192MHZ_ABRACON_ABLS-8.192MHZ-B2-T, "Quartz Crystal", Manufacturer=ABRACON, Manufacturer Part Number=ABLS-8.192MHZ-B2-T, Author="CERN DEM MR", Bonding=No, ComponentHeight=4.2mm, Component Type=Standard, CreateDate=15.02.2018, HelpURL=\\cern.ch\dfs\Applications\Altium\Datasheets\XTAL_ABRACON_ABLS.pdf, LatestRevisionDate=15.02.2018, Mounted=Yes, PackageDescription="SMD Crystal, Body 11.40mm L X 4.70mm W X 4.20mm H, HC/49US (AT49) ALBS Series", Part Description="Tolerance: ± 20ppm, Stability: ± 50ppm, -20°C to +70°C, 18pF, 80 Ohms ESR, Low Profile Surface Mount Microprocessor Crystal, ABLS Series", Part Number=XTAL_8.192MHZ_ABRACON_ABLS-8.192MHZ-B2-T, Pin Count=2, PressFit=No, Sense=No, SMD=Yes, Socket=No
R348A R348B R348C R348D: "Resistor - 0.1%", Case=0603, Manufacturer=GENERIC, Manufacturer1 ComponentHeight=0.5mm, Manufacturer1 Example="TYCO HOLSWORTHY", Manufacturer1 Part Number=RP73PF1J442RBTDF, Manufacturer Part Number=R0603_442R_0.1%_0.063W_25PPM, Power=0.063W, Tolerance=±0.1%, Author=GK, Component Type=Standard, CreateDate=03.12.2007, HelpURL=\\cern.ch\dfs\Applications\Altium\Datasheets\R0603_Tyco_RN73.pdf, LatestRevisionDate=13.03.2008, Mounted=Yes, Part Description="Thin Film Chip Resistor", Part Number=R0603_442R_0.1%_0.063W_25PPM, Pin Count=2, PressFit=No, Sense=No, SMD=Yes, Socket=No, Status="Not Recommended", TC=±25ppm
R349A R349B R349C R349D: library part R0402_22K_1%_0.0625W_100PPM, "Resistor - 1%", Case=0402, Manufacturer=GENERIC, Manufacturer1 ComponentHeight=0.4mm, Manufacturer1 Example="YAGEO PHYCOMP", Manufacturer1 Part Number=232270672203L, Power=0.0625W, Tolerance=±1%, Author="CERN DEM JLC", Component Type=Standard, CreateDate=03.12.2007, HelpURL=\\cern.ch\dfs\Applications\Altium\Datasheets\R0402_Phycomp_RC0402.pdf, LatestRevisionDate=17.10.2012, Manufacturer Part Number=R0402_22K_1%_0.0625W_100PPM, Mounted=Yes, Part Description="General Purpose Thick Film Chip Resistor", Part Number=R0402_22K_1%_0.0625W_100PPM, Pin Count=2, PressFit=No, Sense=No, SMD=Yes, Socket=No, Status="Not Recommended", TC=±100ppm/°C
R350A R350B R350C R350D: "Resistor - 0.1%", Case=0603, Manufacturer=GENERIC, Manufacturer1 ComponentHeight=0.5mm, Manufacturer1 Example=Panasonic, Manufacturer1 Part Number=ERA3ARB392V, Manufacturer Part Number=R0603_3k9_0.1%_0.063W_10PPM, Power=0.063W, Tolerance=±0.1%, Author=GK, Component Type=Standard, CreateDate=03.12.2007, HelpURL=\\cern.ch\dfs\Applications\Altium\Datasheets\R0603_Tyco_RN73.pdf, LatestRevisionDate=13.03.2008, Mounted=Yes, Part Description="Thin Film Chip Resistor", Part Number=R0603_3k9_0.1%_0.063W_10PPM, Pin Count=2, PressFit=No, Sense=No, SMD=Yes, Socket=No, Status="Not Recommended", TC=±10ppm
R351A R351B R351C R351D: library part R0603_10M_1%_0.1W_100PPM, "Resistor - 1%", Case=0603, Manufacturer=GENERIC, Manufacturer1 ComponentHeight=0.55mm, Manufacturer1 Example=VISHAY, Manufacturer1 Part Number=CRCW060310M0FKEA, Power=0.1W, Tolerance=±1%, Author="CERN DEM JLC", Component Type=Standard, CreateDate=12.01.2017, HelpURL="\\cern.ch\dfs\Applications\Altium\Datasheets\R0603_VISHAY_CRCW e3.pdf", LatestRevisionDate=12.01.2017, Manufacturer Part Number=R0603_10M_1%_0.1W_100PPM, Mounted=Yes, Part Description="General Purpose Thick Film Chip Resistor", Part Number=R0603_10M_1%_0.1W_100PPM, Pin Count=2, PressFit=No, Sense=No, SMD=Yes, Socket=No, Status=Preferred, TC=±100ppm/°C
R352 R353 R354 R355 R357 R358: library part R0402_10K_1%_0.0625W_100PPM, "Resistor - 1%", Case=0402, Manufacturer=GENERIC, Manufacturer1 ComponentHeight=0.4mm, Manufacturer1 Example="YAGEO PHYCOMP", Manufacturer1 Part Number=232270671003L, Power=0.0625W, Tolerance=±1%, Author="CERN DEM JLC", Component Type=Standard, CreateDate=03.12.2007, HelpURL=\\cern.ch\dfs\Applications\Altium\Datasheets\R0402_Phycomp_RC0402.pdf, LatestRevisionDate=17.10.2012, Manufacturer Part Number=R0402_10K_1%_0.0625W_100PPM, Mounted=Yes, Part Description="General Purpose Thick Film Chip Resistor", Part Number=R0402_10K_1%_0.0625W_100PPM, Pin Count=2, PressFit=No, Sense=No, SMD=Yes, Socket=No, Status="Not Recommended", TC=±100ppm/°C
R356 R360: library part R0402_1K_1%_0.0625W_100PPM, "Resistor - 1%", Case=0402, Manufacturer=GENERIC, Manufacturer1 ComponentHeight=0.4mm, Manufacturer1 Example="YAGEO PHYCOMP", Manufacturer1 Part Number=232270671002L, Power=0.0625W, Tolerance=±1%, Author="CERN DEM JLC", Component Type=Standard, CreateDate=03.12.2007, HelpURL=\\cern.ch\dfs\Applications\Altium\Datasheets\R0402_Phycomp_RC0402.pdf, LatestRevisionDate=17.10.2012, Manufacturer Part Number=R0402_1K_1%_0.0625W_100PPM, Mounted=Yes, Part Description="General Purpose Thick Film Chip Resistor", Part Number=R0402_1K_1%_0.0625W_100PPM, Pin Count=2, PressFit=No, Sense=No, SMD=Yes, Socket=No, Status="Not Recommended", TC=±100ppm/°C
R359: library part RES_1206, "SMD Resistor", Supplier Part Number 1=39K0871, Supplier 1=Newark
R361: library part R0402_100K_1%_0.0625W_100PPM, "Resistor - 1%", Case=0402, Manufacturer=GENERIC, Manufacturer1 ComponentHeight=0.4mm, Manufacturer1 Example="YAGEO PHYCOMP", Manufacturer1 Part Number=232270671004L, Power=0.0625W, Tolerance=±1%, Author="CERN DEM JLC", Component Type=Standard, CreateDate=03.12.2007, HelpURL=\\cern.ch\dfs\Applications\Altium\Datasheets\R0402_Phycomp_RC0402.pdf, LatestRevisionDate=17.10.2012, Manufacturer Part Number=R0402_100K_1%_0.0625W_100PPM, Mounted=Yes, Part Description="General Purpose Thick Film Chip Resistor", Part Number=R0402_100K_1%_0.0625W_100PPM, Pin Count=2, PressFit=No, Sense=No, SMD=Yes, Socket=No, Status="Not Recommended", TC=±100ppm/°C
R362: library part R0402_49R9_1%_0.0625W_100PPM, "Resistor - 1%", Case=0402, Manufacturer=GENERIC, Manufacturer1 ComponentHeight=0.4mm, Manufacturer1 Example="YAGEO PHYCOMP", Manufacturer1 Part Number="232270674999L or RC0402FR-0749R9L", Power=0.0625W, Tolerance=±1%, Author="CERN DEM JLC", Component Type=Standard, CreateDate=2012-10-24, HelpURL=\\cern.ch\dfs\Applications\Altium\Datasheets\R0402_Phycomp_RC0402.pdf, LatestRevisionDate=2012-10-24, Manufacturer Part Number=R0402_49R9_1%_0.0625W_100PPM, Mounted=Yes, Part Description="General Purpose Thick Film Chip Resistor", Part Number=R0402_49R9_1%_0.0625W_100PPM, Pin Count=2, SMD=Yes, Socket=No, Status="Not recommended", Table="Resistors SMD", TC=±100ppm/°C
SW1A SW1B SW1C SW1D: library part SW_OMRON_A6SN-1101, "1 Ways SPST DIP Switch", Manufacturer=OMRON, Manufacturer Part Number=A6SN-1101, Author="CERN DEM JLC", ComponentHeight=4.6mm, Component Type=Standard, CreateDate=25.02.2013, Family=Switch, HelpURL=\\cern.ch\dfs\Applications\Altium\Datasheets\SW_OMRON_A6SN-1101.pdf, LatestRevisionDate=25.02.2013, Mounted=Yes, PackageDescription="Body 4.48x7.5mm, 1 Way SPST Surface-Mounting Slide Switch With Flat Actuator (A6SN Series)", Part Description="1 Way SPST Surface-Mounting Slide Switch With Flat Actuator, Contact Rating 25mA 24VDC", Part Number=SW_OMRON_A6SN-1101, Pin Count=2, PressFit=No, Sense=No, SMD=Yes, Socket=No, Status=None
T37: "45V, 100mA PNP General Purpose Double Transistor", Case=SOT666, Manufacturer="NXP SEMICONDUCTORS", Author="CERN DEM JLC", Bonding=No, ComponentHeight=0.6mm, Component Type=Standard, CreateDate=01.12.2011, Device=BC857BV, HelpURL=\\cern.ch\dfs\Applications\Altium\Datasheets\BC857BV.pdf, LatestRevisionDate=01.12.2011, Manufacturer Part Number=BC857BV, Mounted=Yes, PackageDescription="SOTFL (SOT666), 0.50mm, Pitch; 6 Pin, 1.20mm W X 1.60mm L X 0.60mm H Body, IPC Medium Density", Part Description="-45V -100mA PNP General Purpose Double Transistor", Part Number=BC857BV, Pin Count=6, PressFit=No, Sense=No, SMD=Yes, Socket=No
T38: "N-CHANNEL MOSFET WITH DIODE", Case=SOT23-3, Manufacturer="ON SEMICONDUCTOR", Author="CERN DEM JLC", Bonding=No, ComponentHeight=1.11mm, Component Type=Standard, CreateDate=23.03.2009, Device=BSS138LT1G, HelpURL=\\cern.ch\dfs\Applications\Altium\Datasheets\BSS138LT1G.pdf, LatestRevisionDate=23.03.2009, Manufacturer Part Number=BSS138LT1G, Mounted=Yes, PackageDescription="SOT23 3-Leads, Pitch 0.95mm - Body 1.4x3mm, IPC Medium Density", Part Description="50V 200mA N-Channel Enhancement Mode Field-Effect Transistor", Part Number=BSS138LT1G, Pin Count=3, PressFit=No, Sense=No, SMD=Yes, Socket=No
TP25 TP26: library part SMD_PAD_1.27X1.27MM, Author="CERN DEM JLC", ComponentHeight=0mm, Component Type="Standard (No BOM)", CreateDate=12.01.2008, Family="Test Point", HelpURL=Undefined, LatestRevisionDate=12.01.2008, Mounted=No, PackageDescription="1.27mm x 1.27mm PCB Copper Area (SMD Test Point)", Part Description="1.27mm x 1.27mm PCB Copper Area (SMD Test Point)", Part Number=SMD_PAD_1.27X1.27MM, Pin Count=1, Sense=No, SMD=Yes, Socket=No, Status=None

## Via types
v1: diameter 0.5, hole 0.2, Top to Bot, tented both sides, 171 vias
v2: diameter 0.6, hole 0.4, Top to Bot, tented both sides, 9 vias
v3: diameter 0.5, hole 0.2, Top to Bot, 3 vias
v4: diameter 1.2, hole 0.8, Top to Bot, tented both sides, 2 vias

## Nets (pads, with @x,y where several pads share a name; then routed paths per layer and width w, separated by ;. In a path a pad name is that pad's centre, name@x,y a point inside that pad or via, vN(x,y) a via of type N, cw(c..) or ccw(c..) an arc to the next point about the centre after c; other vN are vias at no path point)
CS0: IC84A.13 IC86.32 | length 50.8
  Top w0.152: v1(5.4,43.5) 5.425,43.475 5.425,42.3 5.413,42.288 v1(5.413,42.3) ; v1(8.775,38.35) 8.775,38.289 9.575,37.488 v1(9.575,37.427)
  Bot w0.152: IC84A.13@1.085,13.175 0.735,13.175 0.077,13.833 0.077,14.916 1.267,16.106 1.267,17.613 3.09,19.436 6.799,19.436 7.336,19.973 8.888,19.973 9.379,20.463 9.379,20.988 9.29,21.077 9.29,22.39 9.553,22.653 9.553,28.38 9.333,28.6 9.333,31.588 9.097,31.823 9.097,33.895 9.953,34.751 9.953,37.049 v1(9.575,37.427) ; v1(5.4,43.5) 5.379,43.5 4.647,44.232 4.647,47.188 5.71,48.251 7.682,48.251 7.75,48.319 IC86.32@7.75,48.45 ; v1(5.413,42.3) 5.538,42.425 8.775,42.425 9.268,41.932 9.268,39.701 9.088,39.521 9.088,38.663 v1(8.775,38.35)
CS1: IC84B.13 IC86.19 | length 53.6
  Bot w0.152: IC84B.13@11.55,13.2 11.2,13.2 10.542,13.858 10.542,16.059 11.337,16.854 11.337,19.21 11.904,19.777 18.097,19.777 21.059,22.739 21.059,36.099 19.758,37.399 16.411,37.399 13.953,39.857 13.953,41.356 13.092,42.217 13.092,43.95 13.929,44.787 13.929,45.671 13.542,46.058 13.542,47.117 13.137,47.522 13.137,50.738 12.225,51.65 IC86.19@11.95,51.65
CS2: IC84C.13 IC86.28 | length 28.2
  Bot w0.152: IC84C.13@0.525,30.45 0.175,30.45 -0.483,31.108 -0.483,33.985 2.715,37.183 6.449,37.183 6.499,37.133 8.594,37.133 9.827,38.366 9.827,38.734 9.647,38.914 9.647,39.29 9.827,39.469 9.827,39.863 11.067,41.103 11.067,42.576 11.215,42.724 11.388,42.724 11.654,42.989 11.654,43.365 11.503,43.515 11.503,46.463 11.168,46.798 11.127,46.798 9.75,48.175 IC86.28@9.75,48.45
CS3: IC84D.13 IC86.27 | length 20.8
  Top w0.152: v1(10.1,39.102) 10.188,39.102 10.963,38.327 v1(11.051,38.327)
  Bot w0.152: v1(10.1,39.102) 11.247,40.248 11.247,40.784 11.347,40.884 11.347,42.287 11.933,42.874 11.933,43.481 11.783,43.631 11.783,46.578 11.284,47.077 11.282,47.077 10.783,47.576 10.783,47.642 10.25,48.175 IC86.27@10.25,48.45 ; v1@11.022,38.326 11.022,33.364 10.572,32.914 10.572,32.492 10.542,32.462 10.542,31.108 11.2,30.45 IC84D.13@11.55,30.45
DEV_RESETn: IC86.25 R361.1 T38.1 | length 14.6
  Top w0.152: v1(12.251,45.802) 14.098,45.802 v1(14.7,45.2)
  Bot w0.152: IC86.25@11.25,48.45 11.25,48.215 11.318,48.147 11.494,48.147 11.929,47.711 11.929,46.827 12.251,46.506 v1(12.251,45.802) ; v1(14.7,45.2) 14.7,43.941 16.198,42.443 16.709,42.443 17.353,41.799 17.353,40.912 17.012,40.571 16.923,40.571 16.35,39.998 16.582,39.766 16.582,39.468 17.33,38.72 R361.1@17.33,38.7
GND: C224A.2 C224B.2 C224C.2 C224D.2 C225A.2 C225B.2 C225C.2 C225D.2 C226A.1 C226B.1 C226C.1 C226D.1 C227.1 C228.1 C229.1 C230.2 C231.1 C232.1 D102.2 D103.2 D104.3 IC84A.10 IC84A.15 IC84A.16 IC84A.21 IC84B.10 IC84B.15 IC84B.16 IC84B.21 IC84C.10 IC84C.15 IC84C.16 IC84C.21 IC84D.10 IC84D.15 IC84D.16 IC84D.21 IC85.1 IC85.2 IC85.3 IC85.4 IC85.7 IC86.5 IC86.21 IC86.33 IC87.5 IC88.3 J97.6 J99.9 J100.9 LD29.1 R357.1 T38.2 TP26.1 | length 185.6
  Top w0.152: v1(8.295,64.405) 9.39,65.5 v1(14.4,65.5) ; 16.6,43.4 16.6,41.477 16.9,41.177 v1(16.9,41.1)
  Top w0.203: v1(1.2,41.2) 1.2,41.12 1.425,40.895 v1(1.425,34.34) 1.425,34.305 1.05,33.93 v1(1.05,32.8) 4.115,32.8 4.419,33.104 7.404,33.104 v1(8.1,33.8) 8.1,34.91 v1(7.55,35.46) 11.364,35.46 v1(12.449,34.375) 12.05,33.976 v1(12.05,32.815) 12.935,32.815 v1(13.875,31.875) 17.425,35.425 v1(18.275,35.425) ; 2.1,22.175 2.1,23.95 ; 4.65,22.6 4.65,24.175 4.675,24.2 ; v1(5.8,57.8) 7.1,57.8 v1(7.9,57) 9.04,57 9.254,56.786 10.314,56.786 ; 7.15,22.55 7.15,24.275 7.2,24.325 ; 10.125,13.4 10.125,10.775 10.425,10.475 ; 10.425,22.3 10.786,22.3 11.181,21.905 11.768,21.905 12.25,21.423 12.25,20.95 ; 13.125,23.75 13.125,22.15 13.15,22.125 ; 18.175,22.05 18.175,23.75 ; v1(18.459,49.698) 19.599,49.698 TP26.1@20,49.296 ; v1(18.575,18.25) 15.806,21.019 15.806,27.983 19.2,31.377 v1(19.2,33.8) 18.275,34.725 v1(18.275,35.425) ; v1(20.376,38.027) 20.322,37.973 20.322,37.472 v1(18.275,35.425)
  Top w0.762: v4(6.7,62.3) 8.158,60.842 10.314,60.842 ; v4(13.3,62.3) 13.216,62.216 11.688,62.216 10.314,60.842 ; 15.7,46 16.6,45.1 16.6,43.4 ; v1(15.9,53.4) 14.484,54.816 12.284,54.816 10.314,56.786 10.314,60.842
  Bot w0.152: LD29.1@7.725,55.7 7.9,55.875 v1(7.9,57) ; v1(9.1,55.7) 9.65,55.7 D104.3@9.7,55.65 ; v1(10.439,44.675) 10.506,44.608 10.661,44.608 11.05,44.22 D102.2@11.05,44.095 ; C230.2@13.8,65.35 13.95,65.5 v1(14.4,65.5) ; T38.2@16.35,41.85 16.364,41.85 16.833,41.381 16.833,41.167 v1(16.9,41.1)
  Bot w0.203: IC84C.15@0.525,31.75 IC84C.21@1.575,31.75 ; v1(1.05,32.8) IC84C.16@1.575,32.8 IC84C.21@1.575,31.75 ; IC84A.15@1.085,14.475 2.135,14.475 v1(3.435,13.175) 2.135,11.875 IC84A.10@2.135,10.825 v1(2.135,9.725) ; v1(1.2,41.2) 1.2,42.011 C229.1@1.277,42.088 ; v1(1.425,34.34) 2.035,34.34 C224C.2@2.05,34.325 ; v1(1.575,27) IC84C.10@1.575,28.1 1.575,29.15 v1(2.875,30.45) IC84C.21@1.575,31.75 ; v1(2,16.525) 2.05,16.575 v1@2.135,16.575 ; IC84A.16@2.135,15.525 2.107,15.553 2.107,16.338 2.057,16.388 2.057,16.497 v1@2.135,16.575 ; C224A.2@2.61,17.05 2.142,16.582 2.137,16.582 2.135,16.58 v1@2.135,16.575 ; C227.1@5.8,51.15 IC86.5@7.05,51.15 9.25,51.15 v1(9.5,50.9) 9.75,50.65 IC86.21@11.95,50.65 ; v1(5.8,57.8) 5.8,57.25 C228.1@5.85,57.2 ; C232.1@6.1,44.75 C231.1@6.1,45.7 ; C232.1@6.1,44.75 7.33,44.75 IC88.3@7.389,44.809 v1(8.4,44.809) ; C226C.1@7.475,33.8 v1(8.1,33.8) ; v1(7.55,35.46) C225C.2@8.85,35.46 ; v1(7.615,18.15) 8.79,18.15 C225A.2@8.85,18.21 ; C226A.1@8.035,16.525 8.069,16.49 v1(8.75,16.49) ; IC84B.15@11.55,14.5 IC84B.21@12.6,14.5 ; IC84D.15@11.55,31.75 12.6,31.75 v1(13.9,30.45) 12.6,29.15 IC84D.10@12.6,28.1 v1(12.6,27) ; v1(12.05,32.815) 12.584,32.815 IC84D.16@12.6,32.8 ; v1(12.325,17.075) C224B.2@13.075,17.075 12.866,16.867 12.866,16.206 12.6,15.94 IC84B.16@12.6,15.55 IC84B.21@12.6,14.5 ; v1(12.449,34.375) 13.025,34.375 C224D.2@13.075,34.325 ; v1(12.6,9.75) IC84B.10@12.6,10.85 12.6,11.9 v1(13.9,13.2) IC84B.21@12.6,14.5 ; D103.2@14.088,49.85 14.142,49.904 14.142,50.546 v1(14.196,50.6) ; J97.6@14.65,53.23 14.82,53.4 v1(15.9,53.4) ; IC85.1@17.858,50.958 17.978,50.838 17.978,50.004 18.228,49.754 18.402,49.754 v1(18.459,49.698) v1@18.491,49.73 ; v1(18.275,35.425) C225D.2@19.525,35.425 ; C226B.1@18.5,16.55 v1(19.1,16.55) ; C226D.1@18.5,33.8 v1(19.2,33.8) ; v1(18.5,46.419) 18.504,46.415 18.504,45.163 IC85.7@18.508,45.158 ; IC85.2@18.508,50.958 18.491,50.941 v1@18.491,49.73 ; v1(18.575,18.25) 19.835,18.25 C225B.2@19.875,18.21 ; IC85.3@19.158,50.958 19.158,49.889 ; IC85.4@19.808,50.958 19.688,50.838 19.688,50.082 19.495,49.889 19.158,49.889 ; v1(20.376,38.027) 20.433,38.084 20.433,38.531 R357.1@20.595,38.694 ; v1@18.491,49.73 18.506,49.745 19.014,49.745 19.158,49.889
  Bot w0.762: J99.9@5.9,61.311 6.616,62.027 6.616,62.216 v4(6.7,62.3) ; v1(8.295,64.405) IC87.5@8.295,65.6 ; v4(13.3,62.3) 13.418,62.3 14.299,61.419 17.181,61.419 J100.9@17.3,61.3
  other v1: 3.475,11.787 13.925,11.837 2,13.162 4.85,13.162 12.475,13.187 15.275,13.237 3.45,14.588 13.924,14.612 13.924,29.025 2.9,29.05 4.294,30.425 1.475,30.45 12.475,30.475 15.325,30.475 2.875,31.875 8.153,49.547 9.553,49.547 10.853,49.547 8.153,50.847 10.853,50.847 8.153,52.147 9.453,52.247 10.85,52.25
IRQ: D67.2 D97.2 D98.2 D99.2 IC86.26 R352.1 | length 70.8
  Top w0.152: v1(8.58,21.833) 10.821,21.834 11.055,21.6 11.083,21.6 11.256,21.426 v1(11.351,21.426) ; v1(10.601,41.277) 11.279,40.599 12.974,40.599 v1(13.5,41.125) 13.921,41.546 13.921,42.021 v1(13.925,42.025) ; v1(11.4,47.6) 13.606,47.6 13.806,47.4 v1(13.9,47.4)
  Bot w0.152: D98.2@2.225,37.64 2.294,37.709 5.892,37.709 5.942,37.659 8.725,37.659 9.368,38.302 9.368,39.405 9.548,39.585 9.548,40.224 v1(10.601,41.277) ; D67.2@3.325,20.618 3.325,20.808 4.35,21.833 v1(8.58,21.833) ; IC86.26@10.75,48.45 10.75,48.176 11.326,47.6 v1(11.4,47.6) ; v1@11.476,21.551 v1(11.351,21.426) 12.377,20.4 13.085,20.4 D97.2@13.275,20.59 ; D97.2@13.275,20.4 D97.2@13.275,20.59 ; v1(13.5,41.125) 13.5,41.031 13.32,40.851 13.32,37.819 D99.2@13.167,37.665 13.167,37.475 13.32,37.321 14.529,37.321 14.725,37.125 14.725,36.875 14.769,36.831 19.931,36.831 20.779,35.983 20.779,22.855 18.3,20.375 13.49,20.375 D97.2@13.275,20.59 ; v1(13.9,47.4) 13.9,46.095 14.209,45.786 14.209,44.561 14.051,44.403 13.94,44.403 13.372,43.835 13.372,42.962 13.542,42.792 13.542,42.408 v1(13.925,42.025)
LED: IC86.13 R358.1 | length 4.8
  Top w0.152: v1(7.2,53.4) 7.85,54.05 v1(9.7,54.05)
  Bot w0.152: v1(7.2,53.4) 7.2,54.01 7.67,54.48 R358.1@7.67,54.5 ; v1(9.7,54.05) 9.725,54.025 9.725,53.375 IC86.13@9.75,53.35